# Altium PCB page_turner.PcbDoc
Units mil, origin at the board's own origin, x right, y up, seen from the top; angles counter-clockwise.
Board outline 3100 x 1100 mil, 2 copper layers (Top Layer, Bottom Layer); 12 components, 31 nets, 83 pads, 0 vias.
Unrouted connection lines stored in the file: 22.
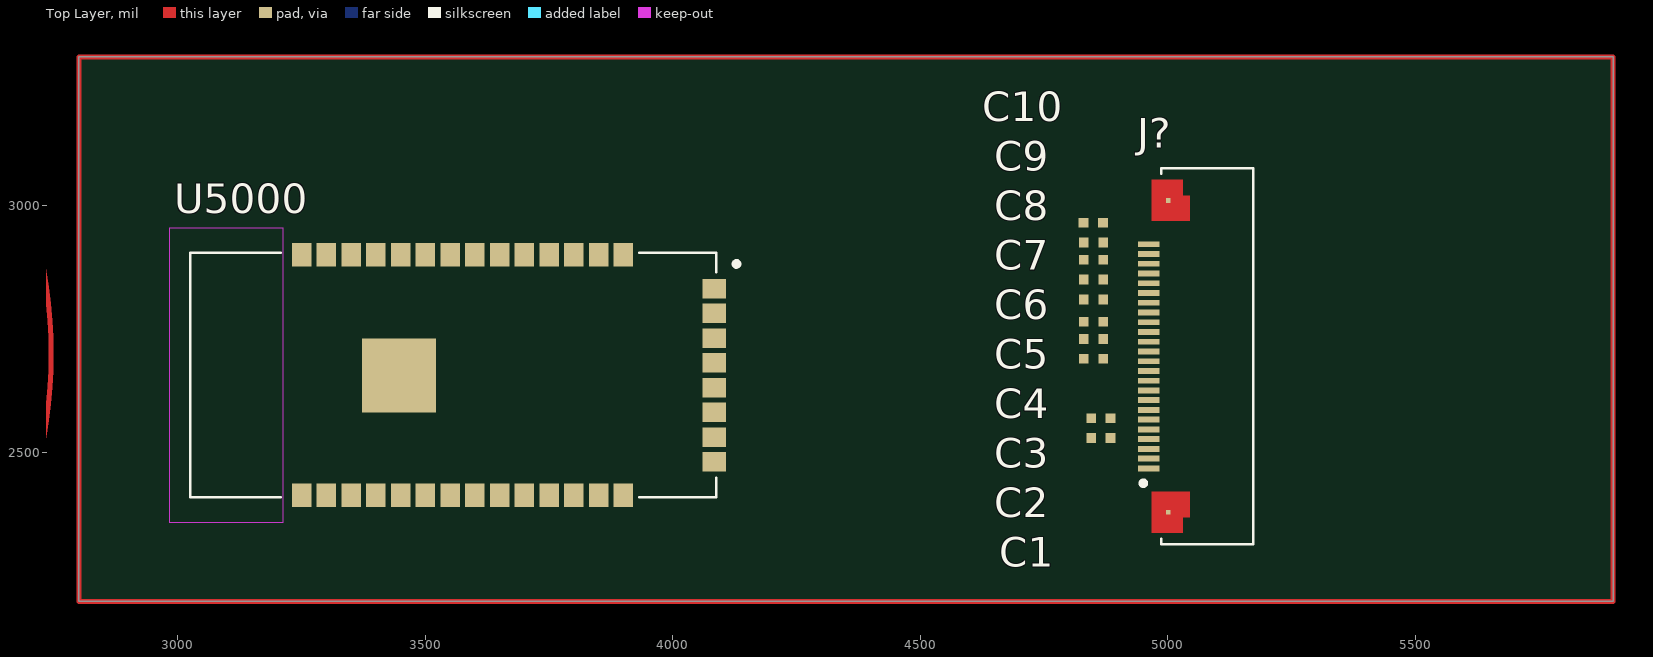
[diagram p0: Top Layer view]
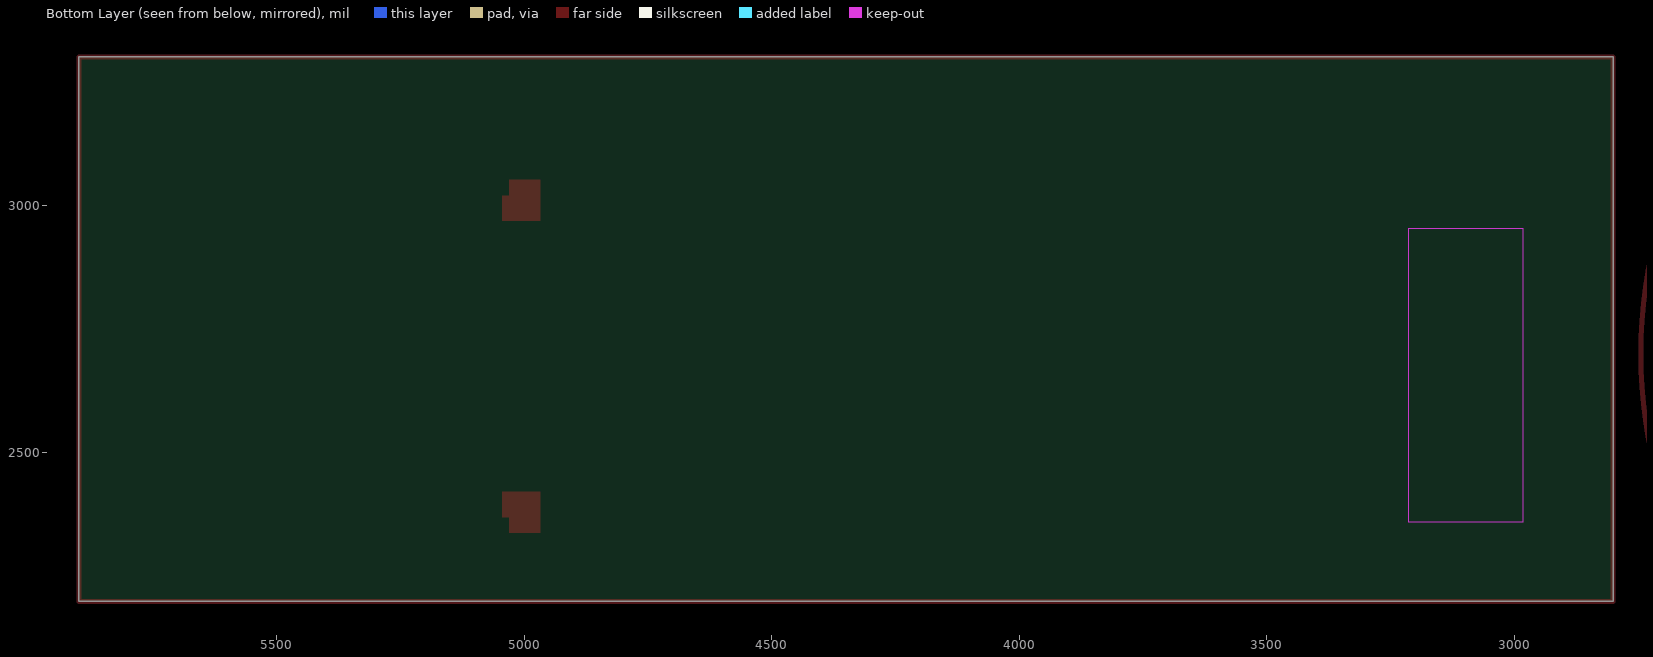
[diagram p1: Bottom Layer view, seen from below]

## Layer stack, top to bottom
Top Solder: solder mask 0.4, Solder Resist, Dk 3.5
Top Layer: signal copper 1.4
Dielectric 1: dielectric 12.6, FR-4, Dk 4.8
Bottom Layer: signal copper 1.4
Bottom Solder: solder mask 0.4, Solder Resist, Dk 3.5

## Board outline
2800,2200 2800,3300 5900,3300 5900,2200

## Design rules (kind name [scope] priority, off if disabled: settings)
Clearance [All] p1: gap=10 ignorepadtopadclearanceinfootprint=FALSE except(0: Arc-Hole Track-Hole SMDPad-Hole THPad-Hole Via-Hole Fill-Hole Poly-Hole Region-Hole Text-Hole)
PolygonConnect [All] p1: connectstyle=Relief reliefconductorwidth=10 reliefentries=4 polygonreliefangle="90 Angle" airgapwidth=10
RoutingVias [All] p1: holewidth=28 width=50 viastyle="Through Hole" minholewidth=28 minwidth=50 maxholewidth=28 maxwidth=50
SolderMaskExpansion [All] p1: expansion=4 istentingtop=FALSE
Width [All] p1: maxlimit=10 minlimit=10 preferedwidth=10
30 further rules are at their usual default settings.

## Classes and differential pairs
component class U_esp32s3_nano: U5000

## Components (designator, comment, footprint, x,y, rotation, side; value= is the part's Value field where it differs from the comment)
C1 "CAP CER 1UF 16V X6S 0402" CAPC_0402_L1W0.5H0.5 4865,2530 r0 top value=1µF
C2 "CAP CER 1UF 16V X6S 0402" CAPC_0402_L1W0.5H0.5 4865,2570 r0 top value=1µF
C3 "CAP CER 0.1UF 25V X7R 0402" CAPC_0402_L1W0.5H0.5 4850,2690 r0 top value=0.1µF
C4 "CAP CER 1UF 16V X6S 0402" CAPC_0402_L1W0.5H0.5 4850,2730 r0 top value=1µF
C5 "CAP CER 1UF 16V X6S 0402" CAPC_0402_L1W0.5H0.5 4850,2765 r0 top value=1µF
C6 "CAP CER 1UF 16V X6S 0402" CAPC_0402_L1W0.5H0.5 4850,2810 r0 top value=1µF
C7 "CAP CER 1UF 16V X6S 0402" CAPC_0402_L1W0.5H0.5 4850.31,2850 r0 top value=1µF
C8 "CAP CER 1UF 16V X6S 0402" CAPC_0402_L1W0.5H0.5 4850,2890 r0 top value=1µF
C9 "CAP CER 1UF 16V X6S 0402" CAPC_0402_L1W0.5H0.5 4850.31,2925 r0 top value=1µF
C10 "CAP CER 1UF 16V X6S 0402" CAPC_0402_L1W0.5H0.5 4849.68,2965 r0 top value=1µF
J? "CONN FFC FPC TOP 24POS 0.5MM R/A" F32Q-1A7H1-11024 5080,2695 r90 top
U5000 "Nano S3 ESP32-S3 Module" NanoS3 4083.62,2831.69 r180 top

## Footprints (in the part's own frame and the unit in brackets; to place one, negate y for a bottom-side part, rotate by r counter-clockwise, add the part's x,y. Pads: shape width x height; smd on the part's side, far side on the other; paste and mask are expansions set on the pad)
CAPC_0402_L1W0.5H0.5 [mm] "Ceramic Capacitors, body 1x0.5mm"
  rect 0.5x0.5 smd: 1(-0.5,0) 2(0.5,0)
  body extent -0.5,-0.25 0.5,0.25, height 0.55
F32Q-1A7H1-11024 [mm]
  rect 0.3x1.1 smd: 1(-5.75,3) 2(-5.25,3) 3(-4.75,3) 4(-4.25,3) 5(-3.75,3) 6(-3.25,3) 7(-2.75,3) 8(-2.25,3) 9(-1.75,3) 10(-1.25,3) 11(-0.75,3) 12(-0.25,3) 13(0.25,3) 14(0.75,3) 15(1.25,3) 16(1.75,3) 17(2.25,3) 18(2.75,3) 19(3.25,3) 20(3.75,3) 21(4.25,3) 22(4.75,3) 23(5.25,3) 24(5.75,3)
  rect 0.25x0.25 smd paste-1 mask+0: SH1(-8,2) SH2(8,2)
  Top Layer region: 9.05,1.25 8.25,1.25 8.25,0.9 6.95,0.9 6.95,2.85 9.05,2.85
  Top Layer region: -6.95,0.9 -8.25,0.9 -8.25,1.25 -9.05,1.25 -9.05,2.85 -6.95,2.85
  silkscreen extent -9.65,-2.35 9.65,3.41, body extent -9.65,-3.15 9.65,2.35, height 2
NanoS3 [mm]
  rect 1.2x1 smd: 1(0,0) 2(0,1.27) 3(0,2.54) 4(0,3.81) 5(0,5.08) 6(0,6.35) 7(0,7.62) 8(0,8.89)
  rect 1x1.2 smd: 9(4.664,10.605) 10(5.934,10.605) 11(7.204,10.605) 12(8.474,10.605) 13(9.744,10.605) 14(11.014,10.605) 15(12.284,10.605) 16(13.554,10.605) 17(14.824,10.605) 18(16.094,10.605) 19(17.364,10.605) 20(18.634,10.605) 21(19.904,10.605) 22(21.174,10.605) 23(4.664,-1.735) 24(5.934,-1.735) 25(7.204,-1.735) 26(8.474,-1.735) 27(9.744,-1.735) 28(11.014,-1.735) 29(12.284,-1.735) 30(13.554,-1.735) 31(14.824,-1.735) 32(16.094,-1.735) 33(17.364,-1.735) 34(18.634,-1.735) 35(19.904,-1.735) 36(21.174,-1.735)
  rect 3.8x3.8 smd: EXP(16.177,4.448)
  Keep-Out Layer region: 22.125,-3.107 27.967,-3.107 27.967,11.981 22.125,11.981
  silkscreen extent -1.27,-1.84 26.89,10.71, body extent -0.6,-2.33 26.9,11.16, height 2

## Part data
C1 C2 C4 C5 C6 C7 C8 C9 C10: library part CER1.0UF16V0402X6S, "1 µF ±10% 16V Ceramic Capacitor X6S 0402 (1005 Metric)", Manufacturer 1="Murata Electronics", Manufacturer Part Number 1=GRM155C81C105KE15J, Operating Temperature="-55°C ~ 105°C", Package="0402 (1005 Metric)", Tolerance=±10%, Voltage=16V, Type=Ceramic
C3: library part CER0.1UF25V0402X7R, "0.1 µF ±10% 25V Ceramic Capacitor X7R 0402 (1005 Metric)", Manufacturer 1="Murata Electronics", Manufacturer Part Number 1=GRM155R71E104KE14J, Operating Temperature="-55°C ~ 125°C", Package="0402 (1005 Metric)", Tolerance=±10%, Voltage=25V, Type=Ceramic
J?: library part F32Q-1A7H1-11024, "24 Position FFC, FPC Connector Contacts, Top 0.020\" (0.50mm) Surface Mount, Right Angle", Current Rating=0.5A, Manufacturer 1="Amphenol ICC (FCI)", Operating Temperature="-40°C ~ 105°C", Voltage Rating=50V, Contact Finish=Gold, Manufacturer Part Number 1=F32Q-1A7H1-11024, Notes="Slide Lock", Number of Positions=24, Pitch="0.020\" (0.50mm)", Series="Aorora F32Q"
U5000: library part NanoS3, Manufacturer 1="Unexpected Maker"

## Nets (pads, with @x,y where several pads share a name; then routed paths per layer and width w, separated by ;. In a path a pad name is that pad's centre, name@x,y a point inside that pad or via, vN(x,y) a via of type N, cw(c..) or ccw(c..) an arc to the next point about the centre after c; other vN are vias at no path point)
3V0: U5000.8
3V3: C3.2 J?.15 J?.16
BS: J?.8
BUSY: J?.9
D/C: J?.11
GDR: J?.2
GND: C1.1 C2.1 C3.1 C4.1 C5.1 C6.1 C7.1 C8.1 C9.1 C10.1 J?.17 U5000.2
NetC1_2: C1.2 J?.4
NetC2_2: C2.2 J?.5
NetC4_2: C4.2 J?.18
NetC5_2: C5.2 J?.19
NetC6_2: C6.2 J?.20
NetC8_2: C8.2 J?.22
NetC10_2: C10.2 J?.24
NetU5000_4: U5000.4
NetU5000_5: U5000.5
NetU5000_6: U5000.6
NetU5000_7: U5000.7
NetU5000_10: U5000.10
NetU5000_11: U5000.11
NetU5000_12: U5000.12
NetU5000_23: U5000.23
NetU5000_25: U5000.25
NetU5000_26: U5000.26
PREVGH: C7.2 J?.21
PREVGL: C9.2 J?.23
RESE: J?.3
RESET: J?.10
SPI_CS: J?.12
SPI_MO: J?.14
SPI_SK: J?.13
pads on no net: J?.1 J?.6 J?.7 J?.SH1 J?.SH2 U5000.1 U5000.3 U5000.9 U5000.13 U5000.14 U5000.15 U5000.16 U5000.17 U5000.18 U5000.19 U5000.20 U5000.21 U5000.22 U5000.24 U5000.27 U5000.28 U5000.29 U5000.30 U5000.31 U5000.32 U5000.33 U5000.34 U5000.35 U5000.36 U5000.EXP
copper on no net: | length 14331.3
  Top Layer w10: 2744,2700 ccw(c1800,2700) 2744,2700 ; 2800,2200 5900,2200 5900,3300 2800,3300 2800,2200

## Text inside footprints (layer, text, board x,y; h text height)
U5000: Top Designator "Antenna GND Clearance" at 3113.78,2861.76 h19.68 r270